# Altium PCB 电池模块_PCB.PcbDoc
Units mm, origin at the board's own origin, x right, y up, seen from the top; angles counter-clockwise.
Board outline 37.5 x 16.53 mm, 2 copper layers (Top Layer, Bottom Layer); 19 components, 14 nets, 107 pads, 36 vias.
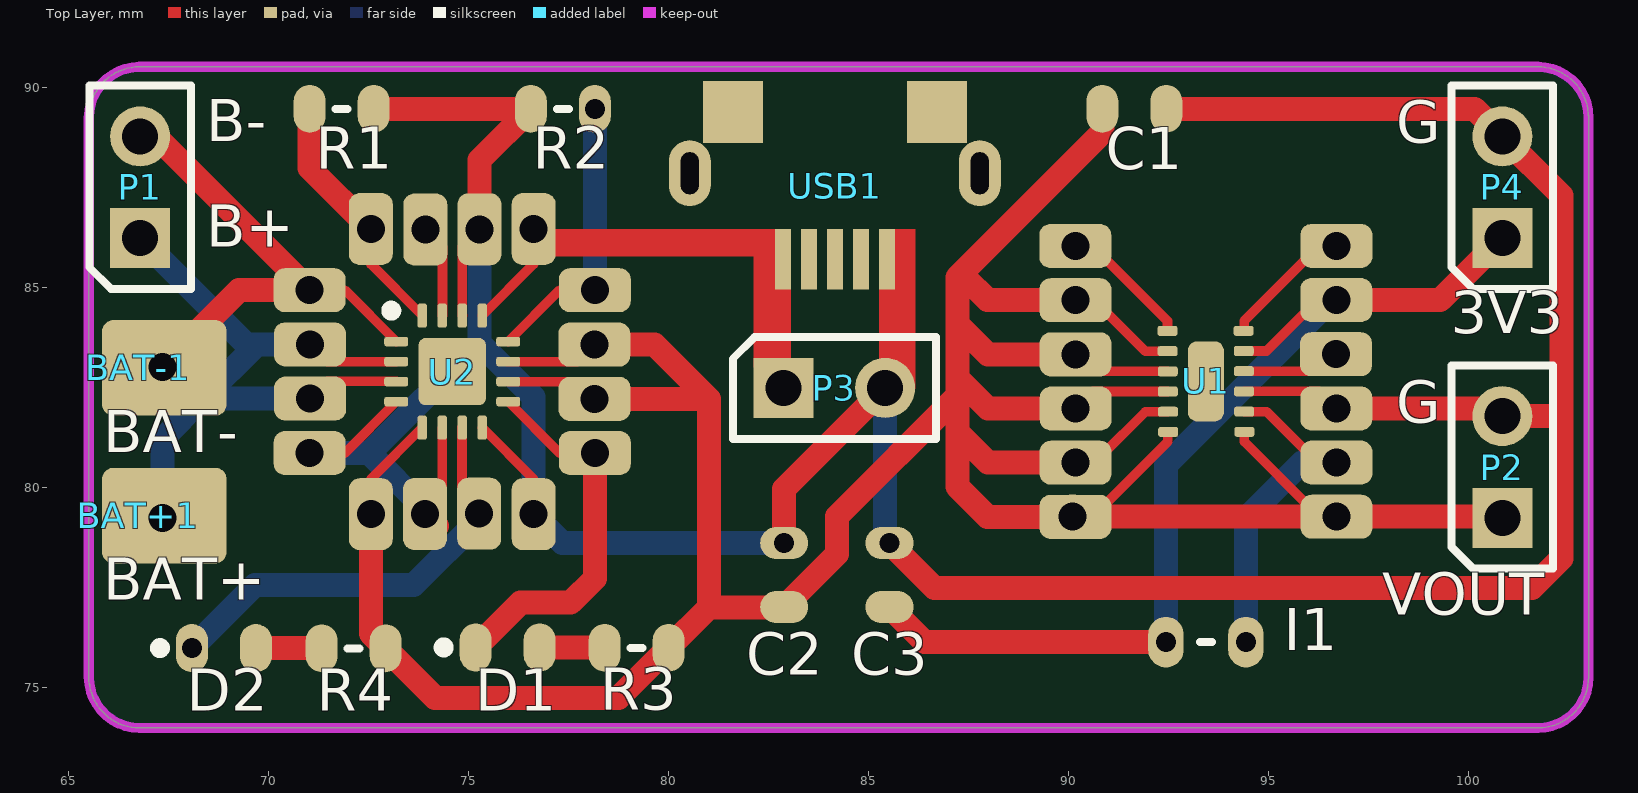
[diagram p0: Top Layer view]
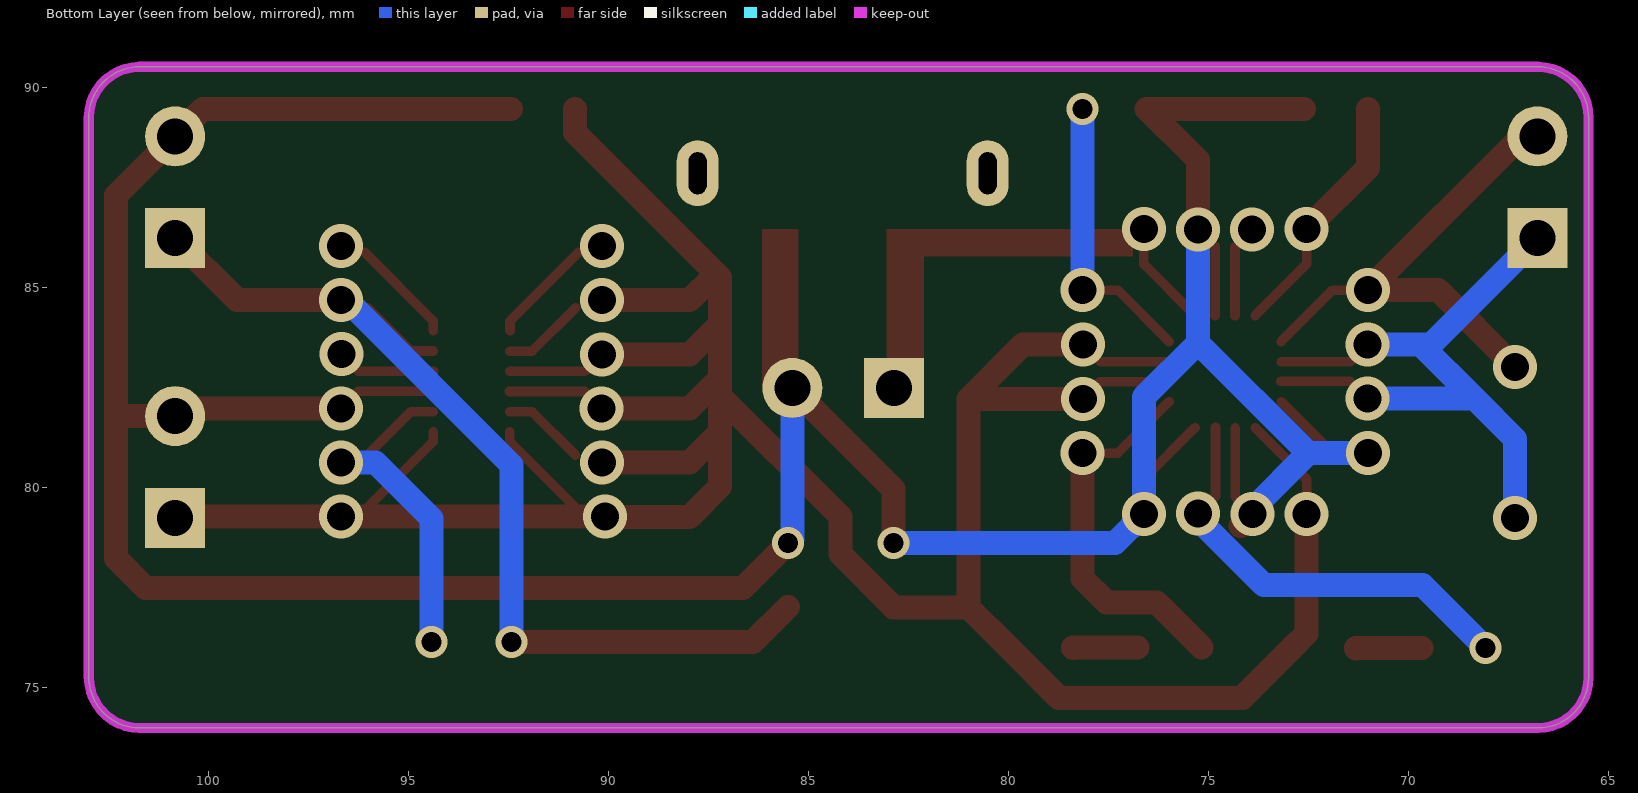
[diagram p1: Bottom Layer view, seen from below]
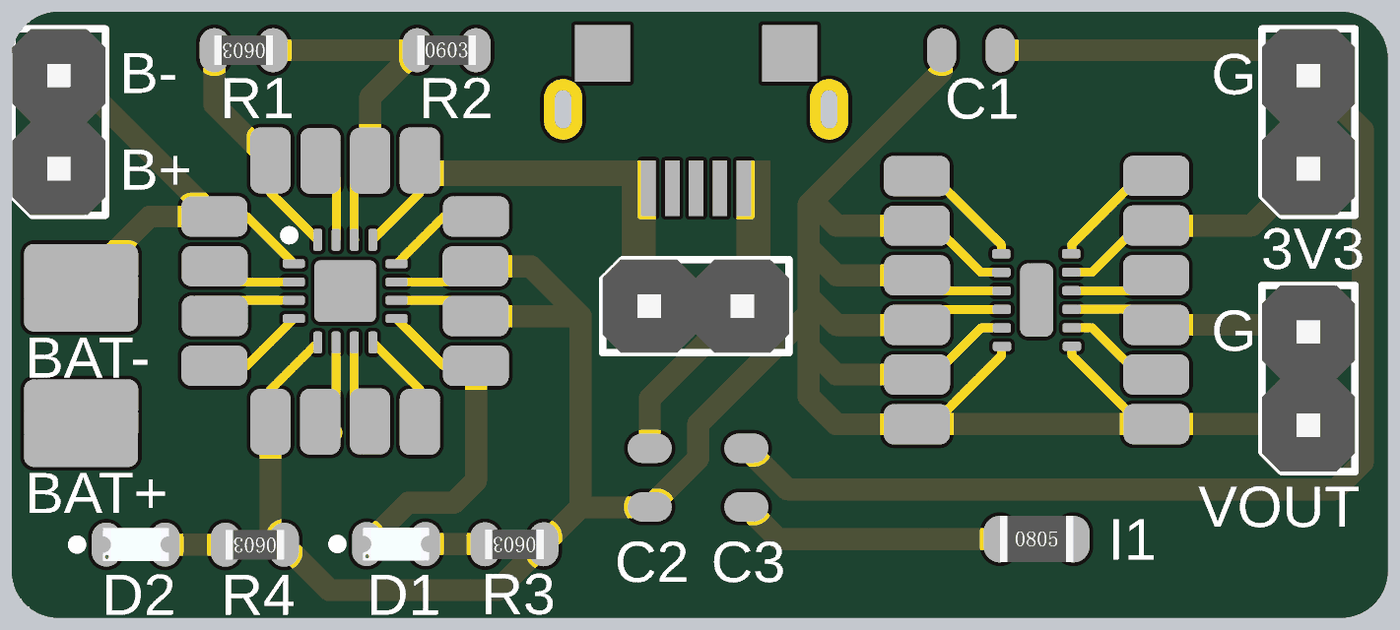
[diagram p2: 3D render of the assembled board from above, using the file's embedded part models]

## Layer stack, top to bottom
Top Solder: solder mask 0.0102, Solder Resist, Dk 3.5
Top Layer: signal copper 0.0356
Dielectric 1: dielectric 0.32, FR-4, Dk 4.8
Bottom Layer: signal copper 0.0356
Bottom Solder: solder mask 0.0102, Solder Resist, Dk 3.5

## Board outline
65.499,75.27 65.499,89.258 cw(c66.769,89.258) 66.769,90.528 68.984,90.528 101.724,90.528 cw(c101.724,89.258) 102.994,89.258 102.994,75.27 cw(c101.724,75.27) 101.724,74 66.769,74 cw(c66.769,75.27)

## Design rules (kind name [scope] priority, off if disabled: settings)
Clearance [All] p1: gap=0.203
MinimumSolderMaskSliver [All] p1: minsoldermaskwidth=0
PolygonConnect [All] p1: connectstyle=Relief reliefconductorwidth=0.254 reliefentries=4 polygonreliefangle="90 Angle" airgapwidth=0.254
RoutingVias [All] p1: holewidth=0.711 width=1.27 viastyle="Through Hole" minholewidth=0.711 minwidth=1.27 maxholewidth=0.711 maxwidth=1.27
SilkToSilkClearance [All] p1: silktosilkclearance=0
SilkToSolderMaskClearance [IsPad] p1: minsilkscreentomaskgap=0 clearancetoexposedcopper=TRUE
SolderMaskExpansion [All] p1: expansion=0.102
Width [All] p1: maxlimit=999 minlimit=0.152 preferedwidth=0.6
27 further rules are at their usual default settings.

## Components (designator, comment, footprint, x,y, rotation, side; value= is the part's Value field where it differs from the comment)
BAT+1 "BAT" BAT+ 66.744,79.311 r270 top
BAT-1 "BAT" BTA- 66.744,83.005 r270 top
C1 "10uF" 1__0603-CAP_ 91.636,89.479 r180 top
C2 "4.7uF" 1__0603-CAP_ 82.883,77.823 r90 top
C3 "10uF" 1__0603-CAP_ 85.517,77.823 r90 top
D1 "LED" 1__0603-LED_ 75.971,76.012 r180 top
D2 "LED" 1__0603-LED_ 68.877,75.997 r180 top
I1 "2.2uH" 1__0805_IND 93.426,76.144 r0 top
P1 "Header 2" HDR1X2 66.782,86.248 r90 top
P2 "Header 2" HDR1X2 100.835,79.253 r90 top
P3 "Header 2" HDR1X2 82.867,82.499 r0 top
P4 "Header 2" HDR1X2 100.835,86.248 r90 top
R1 "1K" 1__0603-RES_ 71.82,89.479 r180 top
R2 "1K" 1__0603-RES_ 77.349,89.479 r0 top
R3 "4K7" 1__0603-RES_ 79.195,76.004 r180 top
R4 "4K7" 1__0603-RES_ 72.121,75.992 r180 top
U1 "TPS62742" TPS62742 93.426,82.664 r180 top
U2 "BQ24078" BQ24078 74.585,82.908 r0 top
USB1 "USB-5P" "1__Micro USB 立贴_" 84.148,84.967 r0 top

## Footprints (in the part's own frame and the unit in brackets; to place one, negate y for a bottom-side part, rotate by r counter-clockwise, add the part's x,y. Pads: shape width x height; smd on the part's side, far side on the other; paste and mask are expansions set on the pad)
1__0603-CAP_ [mm]
  oval 0.8x1.2 smd: 1(-0.8,0) 2(0.8,0)
  body extent -0.88,-0.48 0.87,0.48, height 0.85
1__0603-LED_ [mm]
  oval 0.8x1.2 smd: 1(-0.8,0) 2(0.8,0)
  silkscreen extent 1.47,-0.12 1.72,0.12, body extent -0.9,-0.45 0.9,0.45, height 0.8
1__0603-RES_ [mm]
  oval 0.8x1.2 smd: 1(-0.8,0) 2(0.8,0)
  silkscreen extent -0.15,0 0.15,0, body extent -0.8,-0.4 0.8,0.4, height 0.45
1__0805_IND [mm]
  oval 0.889x1.27 smd: 1(-1,0) 2(1,0)
  silkscreen extent -0.15,0 0.15,0, body extent -1,-0.63 1,0.63, height 0.55
"1__Micro USB 立贴_" [mm]
  oval 1.05x1.65 hole 0.45 slot 1.05 at 90 deg: 0(-3.625,2.9) 0(3.625,2.9)
  rect 1.5x1.55 smd: 0(-2.55,4.425) 0(2.55,4.425)
  rect 0.4x1.51 smd: 1(-1.3,0.75) 2(-0.65,0.75) 3(0,0.75) 4(0.65,0.75) 5(1.3,0.75)
BAT+ [mm]
  rrect50% 1.1x1.8 smd: 1(0.003,-0.012)
BQ24078 [mm] "充电芯片"
  rrect20% 1.68x1.68 smd: 0(0,0)
  rrect50% 0.6x0.24 smd: 1(-1.4,0.75) 2(-1.4,0.25) 3(-1.4,-0.25) 4(-1.4,-0.75) 9(1.4,-0.75) 10(1.4,-0.25) 11(1.4,0.25) 12(1.4,0.75)
  rrect50% 0.24x0.6 smd: 5(-0.75,-1.4) 6(-0.25,-1.4) 7(0.25,-1.4) 8(0.75,-1.4) 13(0.75,1.4) 14(0.25,1.4) 15(-0.25,1.4) 16(-0.75,1.4)
  silkscreen extent -1.65,1.4 -1.4,1.65
BTA- [mm]
  rrect50% 1.1x1.8 smd: 2(0.003,-0.012)
HDR1X2 [mm] "Connector; Header; 2 Position"
  rect 1.5x1.5 hole 0.9: 1(0,0)
  round 1.5 hole 0.9: 2(2.54,0)
  silkscreen extent -1.27,-1.27 3.81,1.27, body extent -1.27,-1.27 3.81,1.27, height 8.54
TPS62742 [mm] "稳压芯片"
  rrect50% 0.9x2 smd: 0(0,0)
  rrect50% 0.5x0.25 smd: 1(-0.961,1.261) 2(-0.958,0.756) 3(-0.954,0.251) 4(-0.95,-0.254) 5(-0.946,-0.759) 6(-0.942,-1.264) 7(0.961,-1.261) 8(0.958,-0.756) 9(0.954,-0.251) 10(0.95,0.254) 11(0.946,0.759) 12(0.942,1.264)

## Part data
C1 C2 C3: library part Cap, "Capacitor"
D1 D2: library part LED0, "Typical INFRARED GaAs LED"
I1: library part 电感
P1 P2 P3 P4: "Header, 2-Pin"
R1 R2 R3 R4: library part Res2, "Resistor"
U1: "锂电池稳压"
U2: "充电芯片"
USB1: "USB CONNECTOR"

## Free pads (board coordinates)
  rrect50% 1.8x1.1 smd: 0(66.731,78.664) 0(66.731,82.357) 0(66.732,79.953) 0(66.732,83.646) 0(68.043,78.664) 0(68.043,82.357) 0(68.043,79.309) 0(68.043,83.002) 0(68.044,79.953) 0(68.044,83.646) 0(71.02,80.872) 0(71.02,84.944) 0(71.026,83.589) 0(71.032,82.233) 0(78.137,83.583) 0(78.143,82.227) 0(78.149,80.872) 0(78.149,84.944) 0(90.16,86.049) 0(90.164,79.277) 0(90.164,84.694) 0(90.167,80.631) 0(90.167,83.34) 0(90.171,81.986) 0(96.681,83.343) 0(96.685,81.989) 0(96.685,84.697) 0(96.689,80.634) 0(96.689,86.052) 0(96.693,79.28)
  rrect50% 1.1x1.8 smd: 0(72.548,79.344) 0(72.548,86.473) 0(73.904,79.35) 0(73.91,86.461) 0(75.259,79.356) 0(75.265,86.467) 0(76.621,79.344) 0(76.621,86.473)

## Via types
v1: diameter 1.1, hole 0.7, Top Layer to Bottom Layer, tented both sides, 30 vias
v2: diameter 0.8, hole 0.5, Top Layer to Bottom Layer, tented both sides, 6 vias

## Nets (pads, with @x,y where several pads share a name; then routed paths per layer and width w, separated by ;. In a path a pad name is that pad's centre, name@x,y a point inside that pad or via, vN(x,y) a via of type N, cw(c..) or ccw(c..) an arc to the next point about the centre after c; other vN are vias at no path point)
BAT-POWER: BAT+1.1 P1.1 pad.0@66.731,78.664 pad.0@66.732,79.953 pad.0@68.043,78.664 pad.0@68.043,79.309 pad.0@68.044,79.953 pad.0@71.026,83.589 pad.0@71.032,82.233 U2.2 U2.3 | length 17.4
  Top Layer w0.24: v1(71.026,83.589) 71.457,83.158 U2.2 ; pad.0@71.463,82.664 U2.3@73.191,82.664
  Bottom Layer w0.6: P1.1 69.441,83.589 69.7,83.589 ; v1(67.338,79.253) 67.338,81.227 68.345,82.233 ; v1(71.026,83.589) 69.7,83.589 ; v1(71.032,82.233) 68.345,82.233 ; 68.345,82.233 69.7,83.589
Charging-STA: D1.2 pad.0@78.149,80.872 U2.9 | length 9.5
  Top Layer w0.24: U2.9 77.271,80.872 v1(78.149,80.872)
  Top Layer w0.6: D1.2 76.297,77.137 77.547,77.137 78.149,77.739 v1(78.149,80.872)
GND: C1.1 C2.2 C3.2 P2.2 P3.2 P4.2 pad.0@71.02,80.872 pad.0@73.904,79.35 pad.0@75.265,86.467 pad.0@76.621,79.344 pad.0@96.685,81.989 R1.1 R2.1 U1.3 U2.4 U2.6 U2.8 U2.14 USB1.5 | length 94.2
  Top Layer w0.24: v1(71.02,80.872) 71.898,80.872 U2.4 ; v1(73.904,79.35) 74.335,79.78 U2.6 ; U2.14@74.841,84.314 U2.14 74.835,86.036 v1(75.265,86.467) ; U2.8 76.621,80.222 v1(76.621,79.344) ; U1.3 96.26,82.413 v1(96.685,81.989) ; P2.2@100.64,81.989 P2.2
  Top Layer w0.6: R1.1 R2.1 75.265,88.195 v1(75.265,86.467) ; v1(73.904,79.35) pad.0@74.206,79.047 ; v2(82.883,78.623) 82.883,79.974 P3.2 ; v2(85.517,78.623) 86.637,77.503 101.577,77.503 102.316,78.242 102.316,81.74 ; C1.1 100.145,89.479 P4.2 102.316,87.307 102.316,81.74 ; v1(96.685,81.989) P2.2@100.64,81.989 ; P2.2 102.263,81.793 102.316,81.74
  Bottom Layer w0.6: v1(71.02,80.872) 72.509,80.872 ; v1(73.904,79.35) 73.904,79.478 72.509,80.872 ; v1(75.265,86.467) 75.265,83.628 ; v2(82.883,78.623) 77.341,78.623 v1(76.621,79.344) 76.621,82.272 75.265,83.628 ; P3.2 85.407,78.732 v2(85.517,78.623) ; 72.509,80.872 75.265,83.628
NetBAT+1_2: 
NetBAT-1_2: BAT-1.2 P1.2 pad.0@66.731,82.357 pad.0@66.732,83.646 pad.0@68.043,82.357 pad.0@68.043,83.002 pad.0@68.044,83.646 pad.0@71.02,84.944 U2.1 | length 13
  Top Layer w0.24: v1(71.02,84.944) 71.898,84.944 U2.1
  Top Layer w0.6: P1.2 67.176,88.788 v1(71.02,84.944) 69.26,84.944 v1(67.338,83.022)
NetD1_1: D1.1 R3.2 | length 1.6
  Top Layer w0.6: D1.1 78.387,76.012 R3.2
NetD2_1: D2.1 R4.2 | length 1.6
  Top Layer w0.6: D2.1 71.316,75.997 R4.2
NetI1_2: I1.2 pad.0@96.689,80.634 U1.2 | length 8
  Top Layer w0.24: U1.2 94.944,81.908 pad.0@96.027,80.825
  Bottom Layer w0.6: v2(94.426,76.144) 94.426,79.232 95.829,80.634 v1(96.689,80.634)
NetR1_2: pad.0@72.548,86.473 R1.2 U2.16 | length 6.3
  Top Layer w0.24: v1(72.548,86.473) 72.548,85.594 U2.16
  Top Layer w0.6: R1.2 71.02,88.001 v1(72.548,86.473)
NetR2_2: pad.0@78.149,84.944 R2.2 U2.12 | length 7.2
  Top Layer w0.24: U2.12 77.271,84.944 v1(78.149,84.944)
  Bottom Layer w0.6: v1(78.149,84.944) v2(78.149,89.479)
POWER: C1.2 C2.1 P2.1 pad.0@72.548,79.344 pad.0@78.137,83.583 pad.0@78.143,82.227 pad.0@90.164,79.277 pad.0@90.164,84.694 pad.0@90.167,80.631 pad.0@90.167,83.34 pad.0@90.171,81.986 pad.0@96.693,79.28 R3.1 R4.1 U1.1 U1.8 U1.9 U1.10 U1.11 U1.12 U2.5 U2.10 U2.11 | length 92.5
  Top Layer w0.24: v1(72.548,79.344) 72.548,80.222 U2.5 ; U2.11@75.979,83.152 pad.0@77.706,83.152 ; U2.10 77.712,82.658 v1(78.143,82.227) ; v1(90.167,83.34) 90.592,82.915 U1.9 ; pad.0@90.596,82.41 U1.10 ; pad.0@90.749,79.432 92.469,81.151 U1.12@92.469,81.4 ; pad.0@90.825,84.503 91.908,83.42 U1.8 ; pad.0@90.829,80.822 91.912,81.905 U1.11@92.472,81.905 ; U1.1 94.388,81.154 pad.0@96.107,79.435
  Top Layer w0.6: v1(72.548,79.344) 72.548,76.364 R4.1 74.158,74.755 78.745,74.755 R3.1 81.001,77.01 ; v1(78.137,83.583) 79.645,83.583 81.001,82.227 ; v1(78.143,82.227) 81.001,82.227 ; C2.1@82.883,77.01 81.001,77.01 ; C2.1 84.206,78.346 84.206,79.289 87.211,82.293 ; 87.215,81.392 87.976,80.631 v1(90.167,80.631) ; 87.215,84.101 87.976,83.34 v1(90.167,83.34) ; v1(90.094,79.28) v1(96.693,79.28) P2.1@100.835,79.28 ; pad.0@90.164,79.277 87.972,79.277 87.211,80.038 87.211,82.293 ; v1(90.164,84.694) 87.972,84.694 87.401,85.265 87.211,85.265 ; v1(90.171,81.986) 87.979,81.986 87.218,82.747 87.218,82.301 87.211,82.293 ; C1.2 90.836,88.89 87.211,85.265 ; 81.001,77.01 81.001,82.227 ; 87.211,82.293 87.211,85.265
USB-POWER: P3.1 pad.0@76.621,86.473 U2.13 USB1.1 | length 2.7
  Top Layer w0.24: U2.13 76.621,85.594 v1(76.621,86.473)
USB-STA: D2.2 pad.0@75.259,79.356 U2.7 | length 10.4
  Top Layer w0.24: pad.0@74.829,79.786 U2.7@74.829,81.514
  Bottom Layer w0.6: v2(68.077,75.997) 69.657,77.577 73.62,77.577 75.259,79.216 v1(75.259,79.356)
VCC: C3.1 I1.1 P4.1 pad.0@96.685,84.697 U1.5 | length 24.6
  Top Layer w0.24: U1.5@94.38,83.423 94.94,83.423 pad.0@96.023,84.506
  Top Layer w0.6: C3.1 86.396,76.144 v2(92.426,76.144) ; v1(96.685,84.697) 99.284,84.697 P4.1
  Bottom Layer w0.6: v2(92.426,76.144) 92.426,80.577 96.546,84.697 v1(96.685,84.697)
pads on no net: U1.0 U1.4 U1.6 U1.7 U2.0 U2.15 USB1.0 USB1.2 USB1.3 USB1.4
copper on no net: | length 9
  Top Layer w0.24: 74.341,84.302 74.341,86.03 ; 90.745,85.894 92.465,84.174 92.465,83.925 ; 94.376,82.918 96.257,82.918 ; 94.384,83.928 94.384,84.177 96.103,85.897
  other v1: 96.681,83.343 90.16,86.049 96.689,86.052 73.91,86.461

## Keep-outs
Top Layer:
  lines w0.254: 96.756,90.528 101.724,90.528
Keep-Out Layer:
  the board outline again, w0.254

## Other copper
Top Layer:
  rectangle net GND: 85.247,82.471 86.167,86.469
  rectangle net USB-POWER: 82.116,83.015 83.048,86.479
  rectangle net USB-POWER: 76.896,85.781 83.048,86.479

## Silkscreen, mask and mechanical layers (free items; w line width, h text height)
Top Overlay:
  text "B-" at 68.433,88.316 h1.8
  text "G" at 98.186,88.28 h1.8
  text "B+" at 68.433,85.677 h1.8
  text "3V3" at 99.543,83.523 h1.8
  text "G" at 98.186,81.285 h1.8
  text "BAT-" at 65.857,80.548 h1.8
  text "BAT+" at 65.857,76.855 h1.8
  text "VOUT" at 97.832,76.479 h1.8
Top Solder:
  lines w0.24: 71.457,83.158 73.185,83.158 ; 71.463,82.664 73.191,82.664 ; 71.898,80.872 73.185,82.158 ; 71.898,84.944 73.185,83.658 ; 72.548,80.222 73.835,81.508 ; 72.548,85.594 73.835,84.308 ; 74.335,79.78 74.335,81.508 ; 74.341,84.302 74.341,86.03 ; 74.829,79.786 74.829,81.514 ; 74.835,84.308 74.835,86.036 ; 75.335,81.508 76.621,80.222 ; 75.335,84.308 76.621,85.594 ; 75.979,83.152 77.706,83.152 ; 75.985,82.158 77.271,80.872 ; 75.985,82.658 77.712,82.658 ; 75.985,83.658 77.271,84.944 ; 90.592,82.915 92.472,82.915 ; 90.596,82.41 92.476,82.41 ; 90.745,85.894 92.465,84.174 92.465,83.925 ; 90.749,79.432 92.469,81.151 92.469,81.4 ; 90.825,84.503 91.908,83.42 92.469,83.42 ; 90.829,80.822 91.912,81.905 92.472,81.905 ; 94.376,82.918 96.257,82.918 ; 94.38,82.413 96.26,82.413 ; 94.38,83.423 94.94,83.423 96.023,84.506 ; 94.384,81.908 94.944,81.908 96.027,80.825 ; 94.384,83.928 94.384,84.177 96.103,85.897 ; 94.388,81.403 94.388,81.154 96.107,79.435